# Altium PCB PCB2.PcbDoc
Units mm, origin at the board's own origin, x right, y up, seen from the top; angles counter-clockwise.
Board outline 27.3 x 27.8 mm, 2 copper layers (Top Layer, Bottom Layer); 22 components, 11 nets, 79 pads, 7 vias.
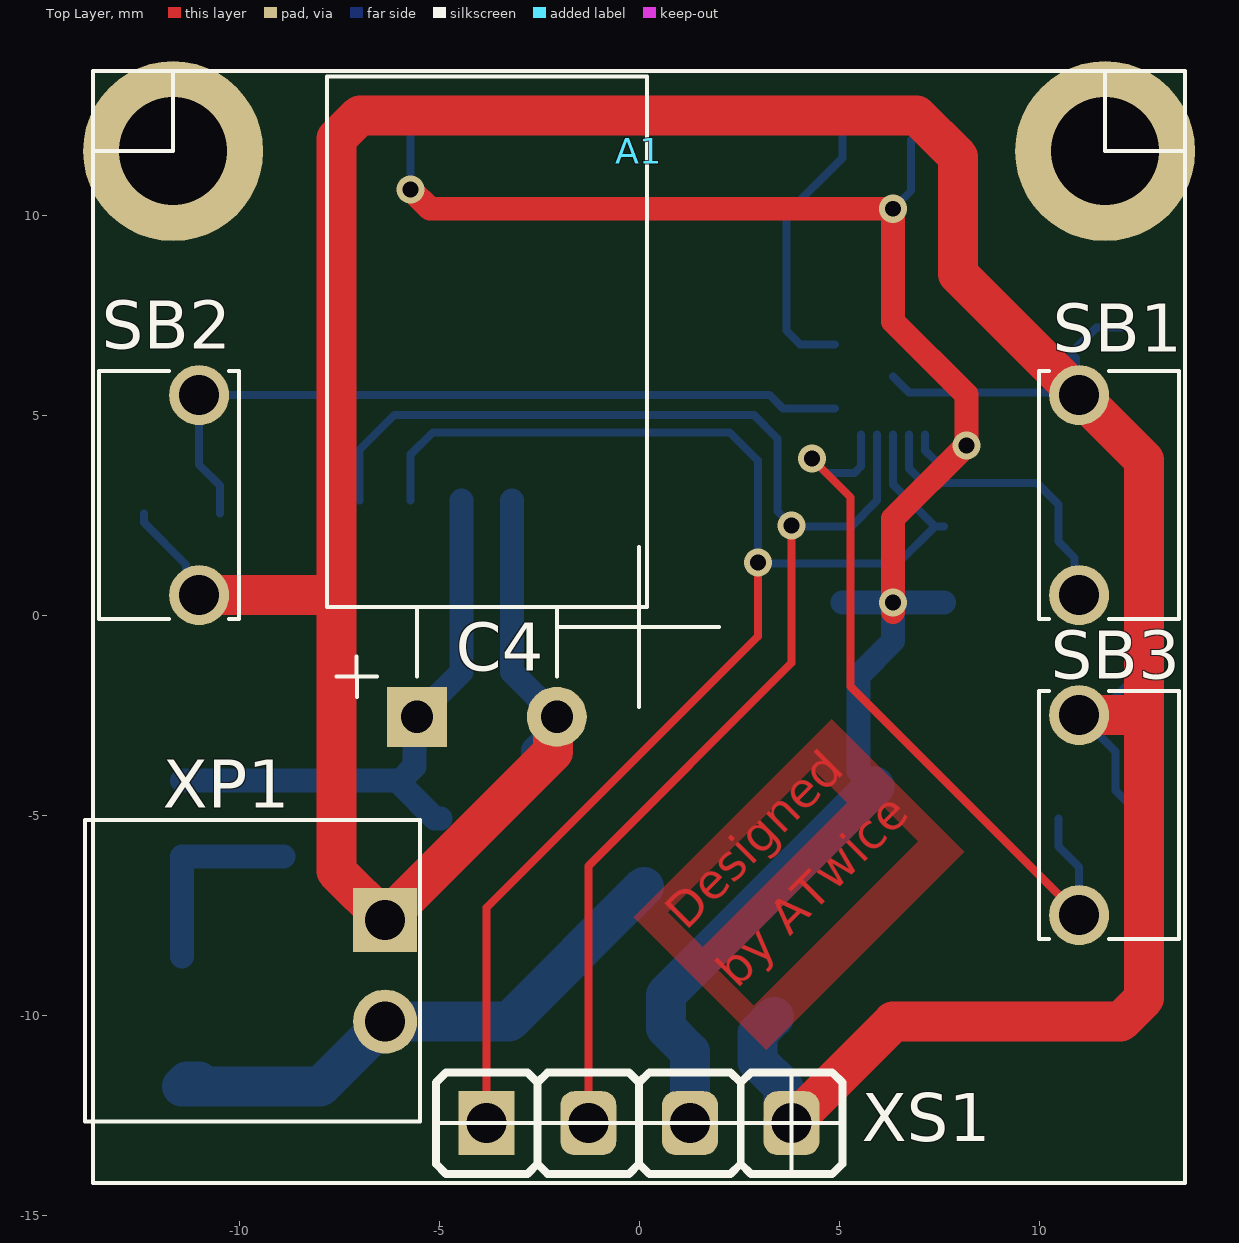
[diagram p0: Top Layer view]
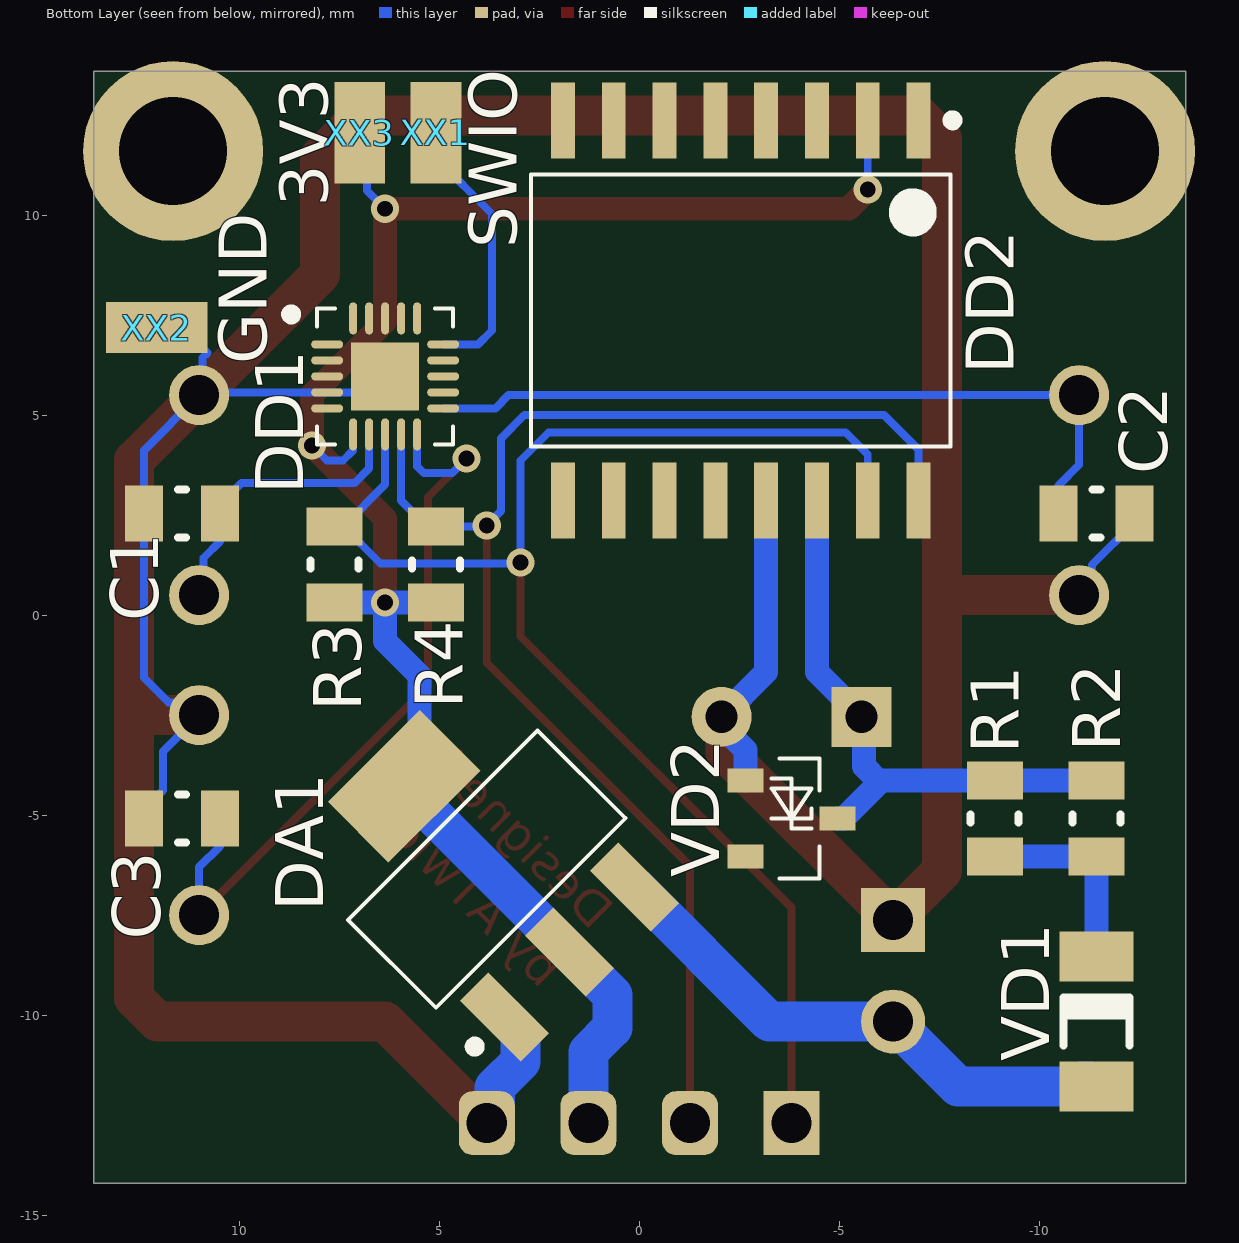
[diagram p1: Bottom Layer view, seen from below]

## Layer stack, top to bottom
Top Solder: solder mask 0.0102, Solder Resist, Dk 3.5
Top Layer: signal copper 0.0356
Dielectric 1: dielectric 0.32, FR-4, Dk 4.8
Bottom Layer: signal copper 0.0356
Bottom Solder: solder mask 0.0102, Solder Resist, Dk 3.5

## Board outline
-13.67,-14.2 -13.67,13.6 13.63,13.6 13.63,-14.2

## Design rules (kind name [scope] priority, off if disabled: settings)
Clearance [All] p1: gap=0.152 ignorepadtopadclearanceinfootprint=FALSE except(0: Fill-Text Poly-Text Region-Text)
ComponentClearance [All] p1: gap=0.102 collisioncheckmode=3 verticalgap=0.102 showdistances=FALSE
PolygonConnect [All] p1: connectstyle=Relief reliefconductorwidth=0.254 reliefentries=4 polygonreliefangle="90 Angle" airgapwidth=0.254
RoutingVias [All] p1: holewidth=0.6 width=1 viastyle="Through Hole" minholewidth=0.4 minwidth=0.7 maxholewidth=0.8 maxwidth=1.3
SMDEntry [All] p1: side=TRUE corner=TRUE anyangle=FALSE
SolderMaskExpansion [IsVia] p1: expansion=0.102 istentingtop=TRUE
SolderMaskExpansion SolderMaskExpansion_1 [All] p2: expansion=0.102 istentingtop=FALSE
SupplyNets "Schematic Supply Nets_2" [InNet('GND')] p1: voltage=0.000
SupplyNets "Schematic Supply Nets_1" [InNet('5V')] p2: voltage=0.000
SupplyNets "Schematic Supply Nets" [InNet('3V3')] p3: voltage=0.000
Width [All] p1: maxlimit=1 minlimit=0.2 preferedwidth=0.6
29 further rules are at their usual default settings.

## Components (designator, comment, footprint, x,y, rotation, side; value= is the part's Value field where it differs from the comment)
A1 "OLED12864 I2C" "OLED12864 I2C connector" 3.81,-12.7 r180 top
C1 "0.1uF 50V" "CAP SMD0805" 11.43,2.54 r0 bottom
C2 "0.1uF 50V" "CAP SMD0805" -11.43,2.54 r180 bottom
C3 "0.1uF 50V" "CAP SMD0805" 11.43,-5.08 r0 bottom
C4 "20F 3.8V" LIC0813LAYDOWN -3.81,-2.54 r0 top
DA1 "LM1117MP-3.3" SOT223 3.81,-6.35 r45 bottom
DD1 "CH32V003F4U6" QFN20_3X3_0.4 6.35,5.969 r180 bottom
DD2 "DS3231S" SO16W -2.54,7.62 r270 bottom
R1 "30R 5%" "SMD 0805" -8.89,-5.08 r90 bottom
R2 "30R 5%" "SMD 0805" -11.43,-5.08 r90 bottom
R3 "3k3 5%" "SMD 0805" 7.62,1.27 r270 bottom
R4 "3k3 5%" "SMD 0805" 5.08,1.27 r270 bottom
SB1 "IT-1101V" IT-1101V_NO_SHIELD 11,3 r90 top value=IT-1101V_no_shield
SB2 "IT-1101V" IT-1101V_NO_SHIELD -11,3 r270 top value=IT-1101V_no_shield
SB3 "IT-1101V" IT-1101V_NO_SHIELD 11,-5 r90 top value=IT-1101V_no_shield
VD1 "LL4148" MINIMELF -11.43,-10.16 r270 bottom
VD2 "BZX84C3V9" SOT23_1A3C -3.81,-5.08 r180 bottom
XP1 "CWF-02R-B" CWF-02R-B -6.35,-7.62 r270 top
XS1 "PBS-04" PBS-04 -3.81,-12.7 r0 top
XX1 "SWIO" SMD_Pad 5.08,12.065 r180 bottom value="SMD Pad"
XX2 "GND" SMD_Pad 12.065,7.188 r270 bottom value="SMD Pad"
XX3 "3V3" SMD_Pad 6.985,12.065 r0 bottom value="SMD Pad"

## Footprints (in the part's own frame and the unit in brackets; to place one, negate y for a bottom-side part, rotate by r counter-clockwise, add the part's x,y. Pads: shape width x height; smd on the part's side, far side on the other; paste and mask are expansions set on the pad)
"CAP SMD0805" [mm]
  rect 0.95x1.4 smd: 1(-0.95,0) 2(0.95,0)
  silkscreen extent -0.1,-0.6 0.1,0.6, body extent -1,-0.62 1,0.63, height 0.85
CWF-02R-B [mm]
  rect 1.6x1.6 hole 1: 1(0,0)
  round 1.6 hole 1: 2(2.54,0)
  silkscreen extent -2.5,-7.5 5.04,0.87, body extent -2.5,-7.5 5.04,0.32, height 5.75
IT-1101V_NO_SHIELD [mm] "Tact button"
  round 1.5 hole 1: 1(-2.5,0) 2(2.5,0)
  silkscreen extent -3.1,-2.5 3.1,1, body extent -3.05,-4.1 3.05,0.9, height 3.06
LIC0813LAYDOWN [mm]
  rect 1.5x1.5 hole 0.8: 1(-1.75,0)
  round 1.5 hole 0.8: 2(1.75,0)
  silkscreen extent -4,0.49 4,16, body extent -4,-0.25 4,16.05, height 8
MINIMELF [mm]
  rect 1.25x1.85 smd: A(1.625,0) C(-1.625,0)
  silkscreen extent -0.6,-0.83 0.6,0.82, body extent -1.85,-0.85 1.85,0.85, height 1.7
"OLED12864 I2C connector" [mm]
  round 4.5 hole 2.7: 0(-7.84,-24.3) 0(15.46,-24.3)
  silkscreen extent -9.84,-26.3 17.46,1.5, body extent -9.84,-26.3 17.46,1.5, height 14.1
PBS-04 [mm]
  rect 1.4x1.6 hole 1: 1(0,0)
  rrect50% 1.4x1.6 hole 1: 2(2.54,0) 3(5.08,0) 4(7.62,0)
  silkscreen extent -1.27,-1.27 8.89,1.27, body extent -1.27,-1.27 8.89,1.23, height 8
QFN20_3X3_0.4 [mm] "QFN, 20-Leads, Body 3,00x3,00mm, Pitch 0,40mm, Thermal Pad 1,70x1,70mm, IPC Medium Density"
  oval 0.8x0.2 smd: 1(-1.45,0.8) 2(-1.45,0.4) 3(-1.45,0) 4(-1.45,-0.4) 5(-1.45,-0.8) 11(1.45,-0.8) 12(1.45,-0.4) 13(1.45,0) 14(1.45,0.4) 15(1.45,0.8)
  oval 0.2x0.8 smd: 6(-0.8,-1.45) 7(-0.4,-1.45) 8(0,-1.45) 9(0.4,-1.45) 10(0.8,-1.45) 16(0.8,1.45) 17(0.4,1.45) 18(0,1.45) 19(-0.4,1.45) 20(-0.8,1.45)
  rect 1.7x1.7 smd: 21(0,0)
  silkscreen extent -2.48,-1.7 1.7,1.7, body extent -1.58,-1.58 1.58,1.58, height 0.75
"SMD 0805" [mm]
  rect 0.95x1.4 smd: 1(-0.95,0) 2(0.95,0)
  silkscreen extent -0.1,-0.6 0.1,0.6, body extent -1,-0.63 1,0.62, height 0.5
SMD_Pad [mm]
  rect 1.27x2.54 smd: 1(0,0)
SO16W [mm] "SO16W"
  rect 1.9x0.6 smd: 1(-4.75,4.445) 2(-4.75,3.175) 3(-4.75,1.905) 4(-4.75,0.635) 5(-4.75,-0.635) 6(-4.75,-1.905) 7(-4.75,-3.175) 8(-4.75,-4.445) 9(4.75,-4.445) 10(4.75,-3.175) 11(4.75,-1.905) 12(4.75,-0.635) 13(4.75,0.635) 14(4.75,1.905) 15(4.75,3.175) 16(4.75,4.445)
  silkscreen extent -4.87,-5.25 3.4,5.42, body extent -5.3,-5.25 5.3,5.25, height 2.65
SOT23_1A3C [mm]
  rect 0.9x0.6 smd: 0(-1.15,-0.95) A(-1.15,0.95) C(1.15,0)
  silkscreen extent -0.5,-1.5 0.7,1.5, body extent -1.3,-1.5 1.3,1.5, height 1.1
SOT223 [mm] "SOT223"
  rect 2.15x1 smd: 1(-2.925,2.3) 2(-2.925,0) 3(-2.925,-2.3)
  rect 2.15x3.25 smd: 2(2.925,0)
  silkscreen extent -3.05,-3.35 1.55,3.47, body extent -3.45,-3.25 3.45,3.25, height 1.7

## Part data
A1: library part "OLED12864 I2C connector", Part Number="OLED12864 I2C connector", Код=2
C1 C2 C3: library part "Cap 0805 0.1uF 50V", "Конденсатор керамический SMD 0805 0.1uF 50V ±20%", Class="Конденсатор неполярный SMD", Part Number="Cap 0805 0.1uF 50V", Код=42
C4: library part "LIC 0813 206", "Ионистор 20F 3.8V 0813", Class=Ионистор, Part Number="LIC 0813 206", Код=15
DA1: "LDO стабилизатор", Class=Микросхема, Part Number=LM1117MP-3.3, Код=137
DD1: "Микроконтроллер CH32V003F4U6 QFN20 -40 +85", Temperature="-40 +85", Class=Микроконтроллер, Part Number=CH32V003F4U6, Код=43
DD2: "Микросхема DS3231S SO16W часы реального времени", Class=Микросхема, Part Number=DS3231S, Код=7, Поле9="часы реального времени"
R1 R2: library part "Res 0805 30R 5%", "Резистор SMD 0805 30R 5%", Class="Резистор SMD", Part Number="Res 0805 30R 5%", Код=1192
R3 R4: library part "Res 0805 3k3 5%", "Резистор SMD 0805 3k3 5%", Class="Резистор SMD", Part Number="Res 0805 3k3 5%", Код=1241
SB1 SB2 SB3: library part IT-1101V_no_shield, "Кнопка тактовая IT-1101V угловая без рамки", Class="Кнопка тактовая", Part Number=IT-1101V_no_shield, Код=14
VD1: "Диод LL4148", Class=Диоды, Part Number=LL4148, Код=12
VD2: "Стабилитрон BZX84C3V9 SOT23", Class=Стабилитроны, Part Number=BZX84C3V9, Код=6
XP1: "Разъём CWF-02R-B вилка угловая 2,50мм тип B", Class=Разъём, Part Number=CWF-02R-B, Код=346, Поле9="вилка угловая 2,50мм тип B"
XS1: "Разъём PBS-04 гнездо однорядное 2,54мм", Class=Разъём, Part Number=PBS-04, Код=120, Поле9="гнездо однорядное 2,54мм"
XX1 XX2 XX3: library part "SMD Pad", Class="Контактная площадка", Part Number="SMD Pad", Код=4

## Via types
v1: diameter 0.7, hole 0.4, Top Layer to Bottom Layer, tented both sides, 7 vias

## Nets (pads, with @x,y where several pads share a name; then routed paths per layer and width w, separated by ;. In a path a pad name is that pad's centre, name@x,y a point inside that pad or via, vN(x,y) a via of type N, cw(c..) or ccw(c..) an arc to the next point about the centre after c; other vN are vias at no path point)
3V3: DA1.2 DD1.6 DD2.2 R3.2 R4.2 XS1.3 XX3.1 | length 47.9
  Top Layer w0.6: v1(-5.715,10.643) -5.232,10.16 v1(6.35,10.16) 6.35,7.341 8.179,5.512 v1@8.179,4.269 ; v1@6.35,0.076 v1(6.35,0.32) 6.35,2.413 v1(8.179,4.242)
  Bottom Layer w0.2: v1(-5.715,10.643) DD2.2 ; v1(6.35,10.16) 6.802,10.612 6.802,11.882 XX3.1 ; DD1.6 7.15,4.119 7.408,3.861 7.798,3.861 v1(8.179,4.242)
  Bottom Layer w0.6: R4.2 v1(6.35,0.32) ; DA1.2@5.878,-4.282 5.489,-3.893 5.489,-1.511 6.35,-0.65 v1(6.35,0.32) ; R3.2 v1(6.35,0.32)
  Bottom Layer w1: XS1.3 1.27,-10.922 0.668,-10.32 0.668,-9.492 1.742,-8.418 DA1.2@5.878,-4.282
5V: DA1.3 VD1.A XP1.2 | length 14.1
  Bottom Layer w1: VD1.A@-11.005,-11.66 -11.305,-11.66 VD1.A -7.975,-11.785 XP1.2 -3.253,-10.16 DA1.3
BUT1: C1.1 DD1.7 SB1.1 | length 7.4
  Bottom Layer w0.2: DD1.7 6.75,3.664 7.112,3.302 9.943,3.302 10.105,3.14 10.48,2.765 C1.1 10.48,1.84 10.887,1.433 10.887,0.613 SB1.1
BUT2: C2.1 DD1.11 SB2.1 | length 19.2
  Bottom Layer w0.2: C2.1 -10.48,3.24 -11,3.76 SB2.1 3.263,5.5 3.594,5.169 DD1.11
BUT3: C3.1 DD1.10 SB3.1 | length 19.1
  Top Layer w0.2: v1(4.318,3.912) 5.283,2.946 5.283,-1.783 SB3.1
  Bottom Layer w0.2: v1(4.318,3.912) 4.674,3.556 5.385,3.556 5.55,3.721 DD1.10 ; C3.1 10.48,-5.78 11,-6.3 SB3.1
GND: C1.2 C2.2 C3.2 C4.2 DA1.1 DD1.4 DD1.21 DD2.13 SB1.2 SB2.2 SB3.2 VD2.A XP1.1 XS1.4 XX2.1 | length 114.8
  Top Layer w1: SB2.2 -7.569,0.5 ; C4.2 -2.156,-2.636 -2.156,-3.426 XP1.1 -7.569,-6.401 -7.569,0.5 ; XS1.4 3.81,-12.6 4.01,-12.4 4.11,-12.4 6.35,-10.16 12.038,-10.16 12.624,-9.574 12.624,-2.591 ; SB3.2 12.533,-2.5 12.624,-2.591 ; -7.569,0.5 -7.569,11.911 -6.983,12.497 6.934,12.497 7.976,11.455 7.976,8.524 SB1.2 12.624,3.876 12.624,-2.591
  Bottom Layer w0.2: C2.2 -12.38,2.315 -11.325,1.26 -11.325,1.177 -11,0.852 SB2.2 ; DD1.21 6.75,5.569 DD1.4 SB1.2@10.931,5.569 ; XX2.1 11.43,7.188 10.795,6.553 10.915,6.433 10.915,5.585 SB1.2@10.931,5.569 ; C3.2 12.38,-4.855 11.905,-4.38 11.905,-3.405 SB3.2 11.352,-2.5 11.672,-2.18 11.765,-2.18 12.38,-1.565 C1.2 12.38,4.12 SB1.2 SB1.2@10.931,5.569
  Bottom Layer w0.6: DD2.13 -3.175,-1.425 C4.2 -2.06,-2.776 -2.66,-3.376 VD2.A
  Bottom Layer w1: DA1.1 2.961,-10.451 2.961,-11.158 3.61,-11.807 3.61,-12.5 XS1.4
NetR1_1: R1.1 R2.1 VD1.C | length 5
  Bottom Layer w0.6: VD1.C R2.1 R1.1
SCL: DD1.9 DD2.16 R4.1 XS1.2 | length 35.7
  Top Layer w0.2: XS1.2 -1.27,-6.27 3.81,-1.19 v1(3.81,2.235)
  Bottom Layer w0.2: DD2.16 -6.985,4.14 -6.121,5.004 2.87,5.004 3.454,4.42 3.454,2.602 3.81,2.247 v1(3.81,2.235) 3.825,2.22 R4.1 5.305,2.22 5.95,2.865 DD1.9
SDA: DD1.8 DD2.15 R3.1 XS1.1 | length 37.5
  Top Layer w0.2: XS1.1 -3.81,-7.31 2.972,-0.528 v1(2.972,1.321)
  Bottom Layer w0.2: DD2.15 -5.715,4.013 -5.156,4.572 2.261,4.572 2.972,3.861 v1(2.972,1.321) 2.997,1.295 6.47,1.295 R3.1@7.395,2.22 ; DD1.8 6.35,3.265 R3.1@7.395,2.22 ; R3.1 R3.1@7.395,2.22
SWIO: DD1.15 XX1.1 | length 6.9
  Bottom Layer w0.2: DD1.15 4.026,6.769 3.683,7.112 3.683,10.033 5.08,11.43 XX1.1
VBAT: C4.1 DD2.14 R1.2 R2.2 VD2.C | length 14.5
  Bottom Layer w0.6: R2.2 R1.2 -5.968,-4.13 ; VD2.C -5.11,-5.08 -5.968,-4.222 -5.968,-4.13 ; DD2.14 -4.445,-1.425 C4.1 -5.617,-2.597 -5.617,-3.779 -5.968,-4.13
pads on no net: A1.0 DD1.1 DD1.2 DD1.3 DD1.5 DD1.12 DD1.13 DD1.14 DD1.16 DD1.17 DD1.18 DD1.19 DD1.20 DD2.1 DD2.3 DD2.4 DD2.5 DD2.6 DD2.7 DD2.8 DD2.9 DD2.10 DD2.11 DD2.12 VD2.0

## Polygon pours and split planes (outlines as drawn)
no net on Top Layer "Top Layer-NetVD31_K" (solid, pour order 0): -0.137,-7.555 4.816,-2.601 8.125,-5.91 3.172,-10.864

## Other copper
Top Layer:
  text "Designed" at 1.381,-8.11 h1.5 r45
  text "by ATwice" at 2.656,-9.565 h1.5 r45

## Silkscreen, mask and mechanical layers (free items; w line width, h text height)
Mechanical 1:
  the board outline again, w0.254